# EAGLE board esp8266heaterv01 (EAGLE 8.0.2)
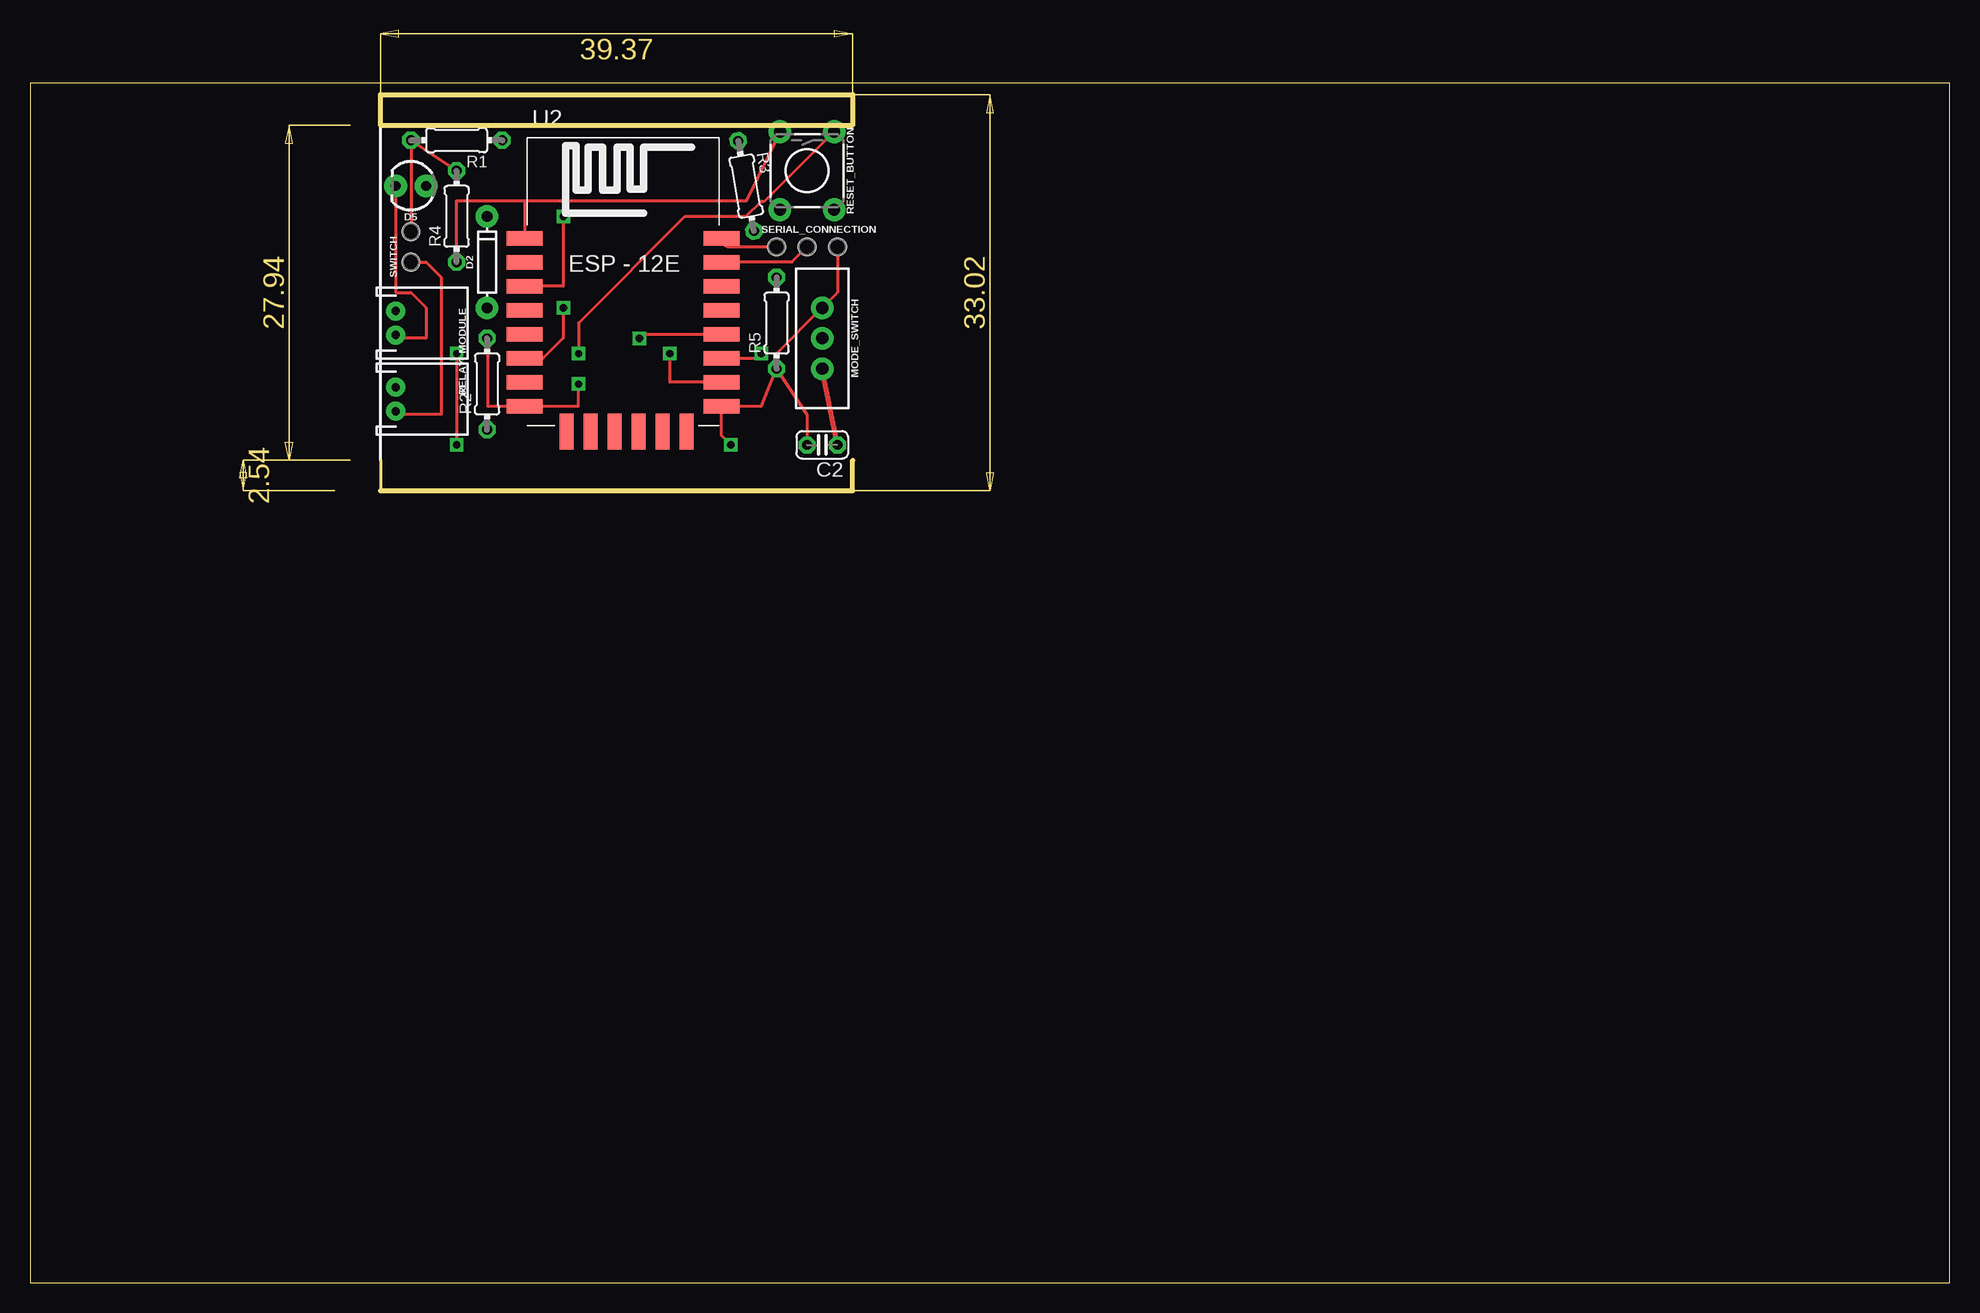
[diagram p0: board, top side]
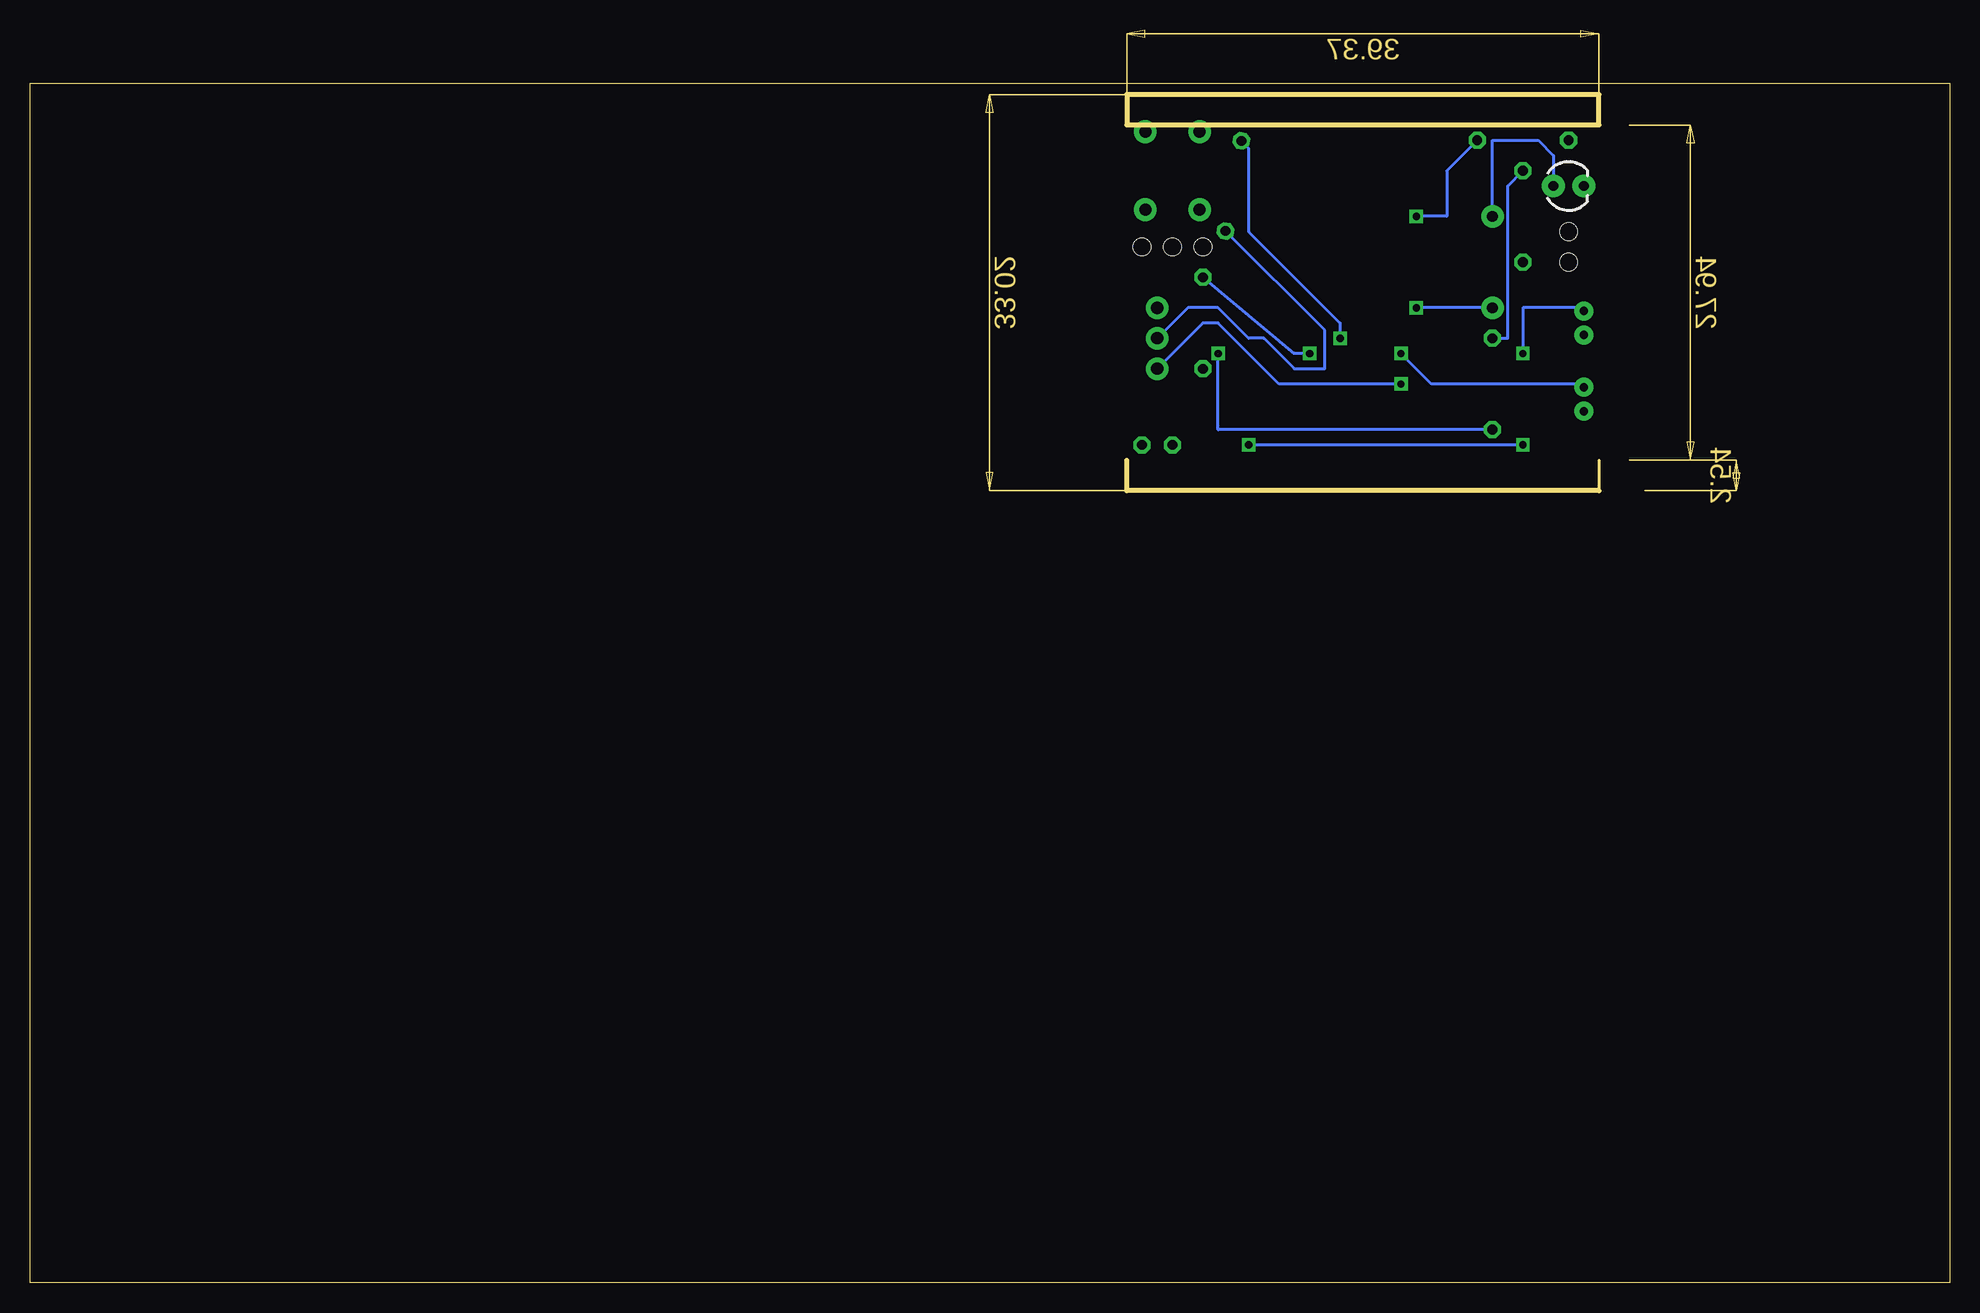
[diagram p1: board, bottom side, seen from below]

Size 160 x 100 mm. Coordinates in mm from the lower left corner, seen from the top.
Outline: 68.58,68.58 68.58,66.04 29.21,66.04 29.21,68.58
Outline: 0,0 160,0 160,100 0,100 0,0
Outline: 29.21,96.52 68.58,96.52 68.58,99.06 29.21,99.06 29.21,96.52
Copper layers (1*16): Top 0.035mm / dielectric 1.5mm / Bottom 0.035mm
Design rules "SparkFun": minimum track width 8mil, minimum drill 20mil, track to track 8mil, track to pad 8mil, pad to pad 8mil, via to via 8mil, smd to smd 8mil, copper to edge 8mil, drill to drill 8mil, minimum pad ring 12mil, minimum via ring 10mil, stop-mask expansion 4mil, vias tented up to drill 20mil, thermal gap 10mil

## Footprints (pad centres in the part's own frame; a part is rotated, then mirrored left to right if it is on the bottom)
C025-024X044 = drill 0.813 octagon: 1 -1.27,0; 2 1.27,0
DIODE-1N4148 = drill 0.9 pad 1.88: A -3.81,0; C 3.81,0
LED_3MM = drill 0.813 pad 1.88: A -1.27,0; K 1.27,0
JST-2-PTH = drill 0.7 pad 1.6: 1 -1,0; 2 1,0
SWITCH_SPDT_PTH_11.6X4.0MM = drill 1.016 pad 1.88: 1 0,2.54; 2 0,0; 3 0,-2.54
0204/7 = drill 0.813 octagon: 1 -3.81,0; 2 3.81,0
TACTILE_SWITCH_PTH_6.0MM = drill 1.016 pad 1.88: 1 -3.251,2.261; 2 3.251,2.261; 3 -3.251,-2.261; 4 3.251,-2.261
1X03_PP_HOLES_ONLY = drill 0.9 pad 0.813: 1 0,0; 2 2.54,0; 3 5.08,0 | hole 1.473: 0,0; 2.54,0; 5.08,0
1X02_PP_HOLES_ONLY = drill 0.889 pad 0.813: 1 0,0; 2 2.54,0 | hole 1.473: 0,0; 2.54,0
ESP12E-SMD = smd 3 x 1.2: ADC -8.3,3.8; CH_PD -8.3,1.8; GND 8.1,-8.2; GPIO0 8.1,-2.2; GPIO2 8.1,-4.2; GPIO4 8.1,-0.2; GPIO5 8.1,1.8; GPIO12 -8.3,-4.2; GPIO13 -8.3,-6.2; GPIO14 -8.3,-2.2; GPIO15 8.1,-6.2; GPIO16 -8.3,-0.2; RESET -8.3,5.8; RXD0 8.1,3.8; TXD0 8.1,5.8; VCC -8.3,-8.2 | smd 1.2 x 3: CS0 -4.8,-10.3; GPIO9 -0.8,-10.3; GPIO10 1.2,-10.3; MISO -2.8,-10.3; MOSI 3.2,-10.3; SCLK 5.2,-10.3

## Placement (x,y rotation side)
C2  100nF  [C025-024X044]  66.04,69.85 180 top
D2  200mA/100V/1V  [DIODE-1N4148]  38.1,85.09 90 top
D4  [LED_3MM]  -36.83,39.37 0 top  (outside the outline)
D5  [LED_3MM]  31.75,91.44 180 top
J1  Power  [JST-2-PTH]  30.48,73.66 270 top
MODE_SWITCH  [SWITCH_SPDT_PTH_11.6X4.0MM]  66.04,78.74 180 top
R1  10K  [0204/7]  35.56,95.25 180 top
R2  10K  [0204/7]  38.1,74.93 90 top
R3  10K  [0204/7]  59.69,91.44 280 top
R4  10K  [0204/7]  35.56,88.9 90 top
R5  10K  [0204/7]  62.23,80.01 90 top
RELAY_MODULE  [JST-2-PTH]  30.48,80.01 270 top
RESET_BUTTON  MOMENTARY-SWITCH-SPST-PTH-6.0MM  [TACTILE_SWITCH_PTH_6.0MM]  64.77,92.71 270 top
SERIAL_CONNECTION  [1X03_PP_HOLES_ONLY]  62.23,86.36 0 top
SWITCH  [1X02_PP_HOLES_ONLY]  31.75,85.09 90 top
U2  [ESP12E-SMD]  49.53,81.28 0 top

## Library data of the parts
C2 = resistor
D2 = SparkFun-DiscreteSemi; PROD_ID: DIO-08378
D4 D5 = SparkFun-LED; PROD_ID: DIO-08794
J1 RELAY_MODULE = sparkfun-con.; PROD_ID: CONN-09863; SKU: PRT-09914
MODE_SWITCH = SparkFun-Switches; PROD_ID: SWCH-08261; SF_SKU: COM-00102
R1-R5 = eagle-ltspice; SPICEMODEL: NONE; SPICEPREFIX: R
RESET_BUTTON = SparkFun-Switches; PROD_ID: SWCH-08441; SF_SKU: COM-00097
SERIAL_CONNECTION SWITCH = SparkFun-Connectors
U2 = esp8266modules

## Nets
N$1: C2.1 MODE_SWITCH.1 R1.2 R2.2 R4.2 SWITCH.2 U2.VCC
N$2: D5.K RELAY_MODULE.2
N$3: R3.1 U2.GPIO0
N$4: R4.1 RESET_BUTTON.3 U2.RESET
N$5: R1.1 U2.CH_PD
N$6: R5.2 U2.GPIO15
N$7: MODE_SWITCH.2 R3.2
N$8: SERIAL_CONNECTION.1 U2.TXD0
N$9: SERIAL_CONNECTION.2 U2.RXD0
N$11: D2.A U2.GPIO12
N$12: R2.1 U2.GPIO2
N$13: J1.1 RESET_BUTTON.1
N$15: J1.2 SWITCH.1
N$16: D2.C D5.A
N$17: C2.2 MODE_SWITCH.3 R5.1 RELAY_MODULE.1 SERIAL_CONNECTION.3 U2.GND

## Tracks (layer width: path | path; a pad name or v marks a point on that pad's centre or on a via)
N$1  (via drill 0.6)
  Top 0.254: R2.2 38.18,78.64 38.18,73.08 U2.VCC 45.72,73.08 v45.72,74.93 | SWITCH.2 R1.2 R4.2
  Top 0.406: C2.1 MODE_SWITCH.1
  Bottom 0.254: 31.77,95.1 R1.2 | 38.18,79.32 R2.2 36.83,78.74 36.83,91.44 R4.2 | v45.72,74.93 55.88,74.93 60.96,80.01 62.23,80.01 MODE_SWITCH.1
N$2
  Top 0.254: D5.K 30.48,82.55 31.75,82.55 33.02,81.28 33.02,78.74 30.75,78.74 RELAY_MODULE.2
N$3  (via drill 0.6)
  Top 0.254: v50.8,78.74 51.14,79.08 U2.GPIO0
  Bottom 0.254: R3.1 58.42,94.58 58.42,87.63 50.8,80.01 v50.8,78.74
N$4
  Top 0.254: R4.1 35.56,90.17 41.23,90.17 | 41.23,90.17 U2.RESET | RESET_BUTTON.3 59.69,90.17 41.23,90.17
N$5  (via drill 0.6)
  Top 0.254: v44.45,88.9 44.45,83.08 U2.CH_PD
  Bottom 0.254: 39.55,95.1 R1.1 41.91,92.71 41.91,88.9 v44.45,88.9
N$6  (via drill 0.6)
  Top 0.254: U2.GPIO15 53.34,75.08 v53.34,77.47
  Bottom 0.254: v53.34,77.47 54.61,77.47 R5.2
N$7
  Bottom 0.254: R3.2 52.07,79.41 52.07,76.2 54.61,76.2 57.15,78.74 58.42,78.74 60.96,81.28 63.5,81.28 MODE_SWITCH.2
N$8
  Top 0.254: U2.TXD0 arc90 58.35,86.36 SERIAL_CONNECTION.1
N$9
  Top 0.254: SERIAL_CONNECTION.2 63.49,85.08 U2.RXD0
N$11  (via drill 0.6)
  Top 0.254: v44.45,81.28 44.45,78.74 42.79,77.08 U2.GPIO12
  Bottom 0.254: D2.A v44.45,81.28
N$12  (via drill 0.6)  (1 unrouted)
  Top 0.254: U2.GPIO2 60.57,77.08 v60.96,77.47
  Bottom 0.254: R2.1 60.96,71.12 v60.96,77.47
N$13  (via drill 0.6)
  Top 0.254: v45.72,77.47 45.72,80.01 54.61,88.9 59.69,88.9 60.96,90.17 61.24,90.17 RESET_BUTTON.1
  Bottom 0.254: J1.1 30.75,74.93 43.18,74.93 v45.72,77.47
N$15
  Top 0.254: J1.2 30.75,72.39 34.29,72.39 34.29,83.82 33.02,85.09 SWITCH.1
N$16
  Bottom 0.254: D2.C 38.1,95.25 34.29,95.25 33.02,93.98 D5.A
N$17  (via drill 0.6)
  Top 0.254: MODE_SWITCH.3 65.84,81.15 | MODE_SWITCH.3 67.31,82.55 SERIAL_CONNECTION.3 | R5.1 64.77,72.39 C2.2 | v35.56,77.47 v35.56,69.85 | v58.42,69.85 57.63,70.64 U2.GND 60.96,73.08 R5.1 | R5.1 62.23,77.47 MODE_SWITCH.3
  Bottom 0.254: RELAY_MODULE.1 30.75,81.28 35.56,81.28 v35.56,77.47 | v35.56,69.85 v58.42,69.85